# Altium PCB USBC charger.PcbDoc
Units mm, origin at the board's own origin, x right, y up, seen from the top; angles counter-clockwise.
Board outline 33.14 x 10.5 mm, 2 copper layers (Top Layer, Bottom Layer); 23 components, 28 nets, 120 pads, 51 vias.
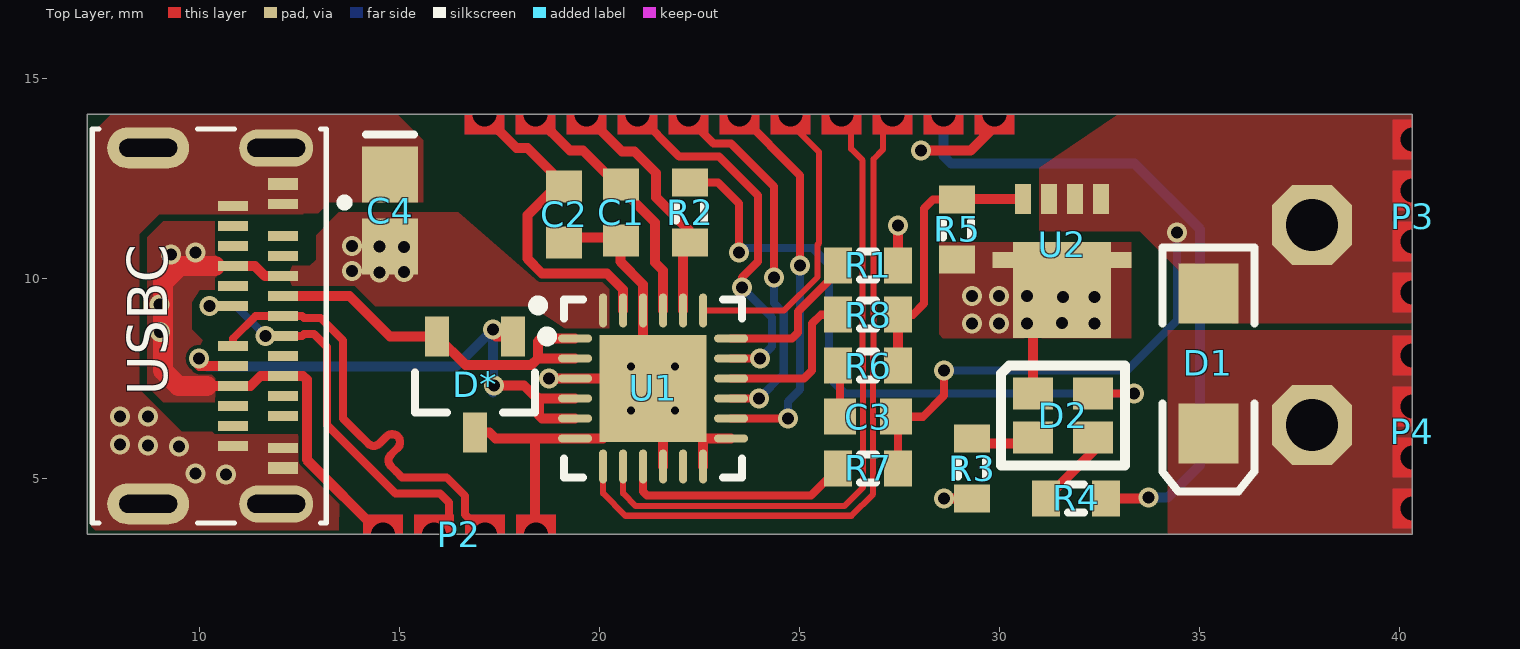
[diagram p0: Top Layer view]
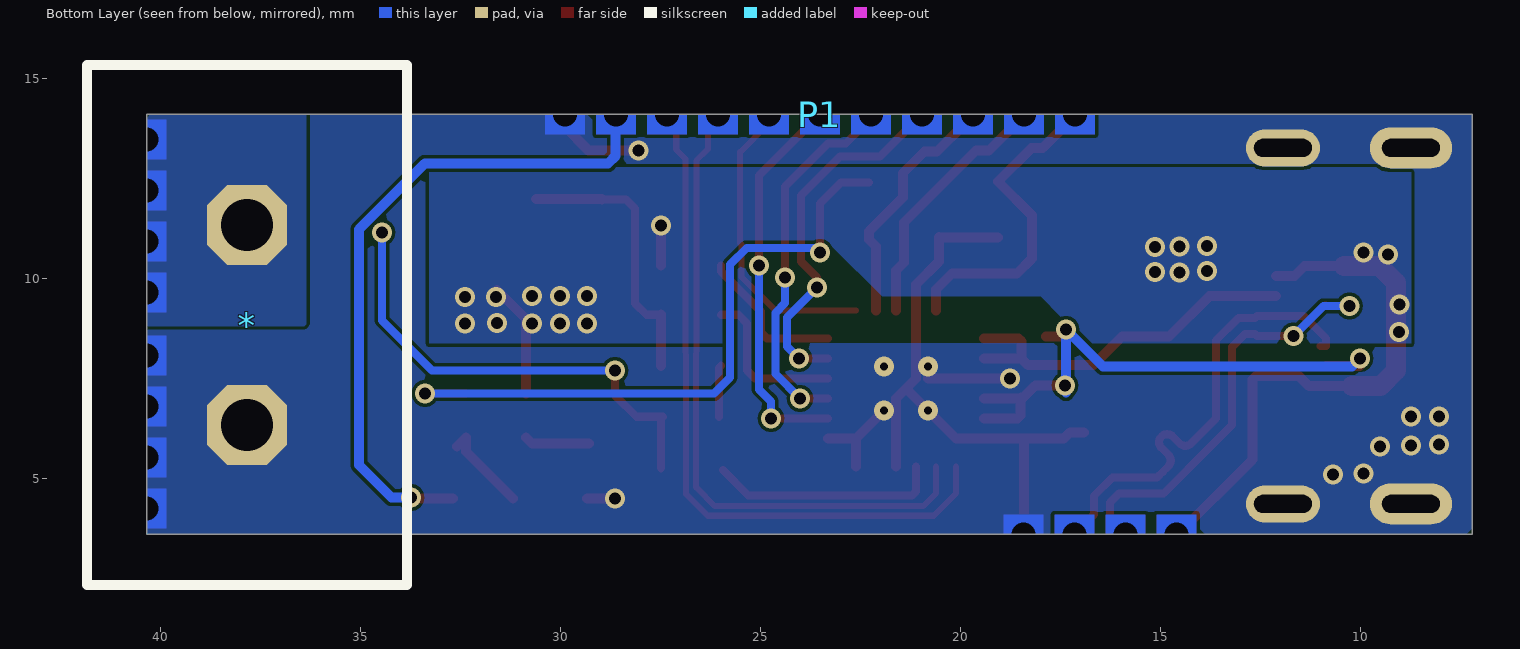
[diagram p1: Bottom Layer view, seen from below]

## Layer stack, top to bottom
Top Solder: solder mask 0.0102, Solder Resist, Dk 3.5
Top Layer: signal copper 0.0356
Dielectric 1: dielectric 0.32, FR-4, Dk 4.8
Bottom Layer: signal copper 0.0356
Bottom Solder: solder mask 0.0102, Solder Resist, Dk 3.5

## Board outline
7.2,14.1 40.335,14.1 40.335,3.6 7.2,3.6

## Design rules (kind name [scope] priority, off if disabled: settings)
Clearance [All] p1: gap=0.089 ignorepadtopadclearanceinfootprint=TRUE
DiffPairsRouting [All] p1: maxlimit=0.254 minlimit=0.089 mostfreqgap=0.2 toplayer_minwidth=0.089 toplayer_maxwidth=0.381 toplayer_prefwidth=0.15 bottomlayer_minwidth=0.089 bottomlayer_maxwidth=0.381 bottomlayer_prefwidth=0.15 maxuncoupledlength=12.7
MatchedLengths usb [All] p1: tolerance=1 checknetsindiffpair=FALSE checkdiffpairvsdiffpair=TRUE checkxsignals=TRUE checkothers=TRUE
PolygonConnect 2pinconn [InNet('GND')] p1: connectstyle=Direct reliefconductorwidth=0.254 reliefentries=4 polygonreliefangle="90 Angle" airgapwidth=0.254
PolygonConnect vbus [InNet('VBUS')] p2: connectstyle=Direct reliefconductorwidth=0.254 reliefentries=4 polygonreliefangle="90 Angle" airgapwidth=0.254
PolygonConnect nothermals [InNet('VOUT')] p3: connectstyle=Direct reliefconductorwidth=0 reliefentries=4 polygonreliefangle="90 Angle" airgapwidth=0
PolygonConnect PolygonConnect_1 [All] p4: connectstyle=Relief reliefconductorwidth=0.254 reliefentries=4 polygonreliefangle="90 Angle" airgapwidth=0.254
RoutingVias [All] p1: holewidth=0.3 width=0.5 viastyle="Through Hole" minholewidth=0.3 minwidth=0.45 maxholewidth=6.3 maxwidth=1.27
SolderMaskExpansion [All] p1: expansion=0.102
Width [All] p1: maxlimit=1 minlimit=0.127 preferedwidth=0.2
29 further rules are at their usual default settings.

## Classes and differential pairs
differential pair USB: +USB_P -USB_N

## Components (designator, comment, footprint, x,y, rotation, side; value= is the part's Value field where it differs from the comment)
* "Component_1" 2pinSrewconnectyor 37.825,11.334 r270 bottom
C1 "Cap Semi" 1608[0603] 20.55,11.65 r90 top value=1uF
C2 "Cap Semi" 1608[0603] 19.125,11.6 r90 top value=1uF
C3 "Cap Semi" 1608[0603] 26.725,6.543 r0 top value=100nF
C4 "Cap Semi" C2512 14.778,11.698 r270 top value=4.7uF
D1 "Diode" 3.2X1.6X1.1 35.23,7.876 r270 top
D2 "SmollCree" SMOLLLEDCREE 32.35,6.025 r180 top
D* "ESDA25" SOT95P245X110-3N 16.9,7.35 r270 top
P1 "Component_1" "edgecon - large" 29.88,14.097 r180 bottom
P2 "edgeconn" edgecon 18.42,3.6 r180 top
P3 "edgeconn" "edgecon - power" 40.335,13.472 r270 top
P4 "edgeconn" "edgecon - power" 40.335,8.075 r270 top
R1 "Res3" J1-0603 26.725,10.325 r0 top value=1K
R2 "Res3" J1-0603 22.275,11.65 r270 top value=22K
R3 "Res3" J1-0603 29.325,5.25 r90 top value=22K
R4 "Res3" J1-0603 31.925,4.5 r180 top value=22K
R5 "Res3" J1-0603 28.95,11.225 r90 top value=100K
R6 "Res3" J1-0603 26.725,7.818 r180 top value=1K
R7 "Res3" J1-0603 26.724,5.254 r180 top value=1K
R8 "Res3" J1-0603 26.725,9.093 r180 top value=22K
U1 "STUSB4500" QFN50P400X400X80_HS-25N 21.35,7.25 r0 top
U2 "STL6P3LLH6" powerflat 32.55,11.989 r180 top
USBC "2305018-2" *TE_2305018-2_2305018-2(PRIMARY) 8.728,8.814 r270 top locked

## Footprints (in the part's own frame and the unit in brackets; to place one, negate y for a bottom-side part, rotate by r counter-clockwise, add the part's x,y. Pads: shape width x height; smd on the part's side, far side on the other; paste and mask are expansions set on the pad)
2pinSrewconnectyor [mm]
  oct 2x2 hole 1.3: 1(0,0) 2(5,0)
  silkscreen extent -4,-4 9,4
3.2X1.6X1.1 [mm] "SMT LED; 2 Flat Leads"
  rect 1.5x1.5 smd: 1(-1.75,0) 2(1.75,0)
  silkscreen extent -2.9,-1.15 3.2,1.15
1608[0603] [mm] "Chip Capacitor, Body 1.6x0.8mm, IPC High Density"
  rect 0.8x0.9 smd: 1(-0.7,0) 2(0.7,0)
  body extent -0.87,-0.48 0.87,0.48, height 1.3
*TE_2305018-2_2305018-2(PRIMARY) [mm]
  rect 0.25x0.75 smd: A1(-3.05,3.375) A2(-2.25,3.375) A3(-1.75,3.375) A4(-1.25,3.375) A5(-0.75,3.375) A6(-0.25,3.375) A7(0.25,3.375) A8(0.75,3.375) A9(1.25,3.375) A10(1.75,3.375) A11(2.25,3.375) A12(3.05,3.375) B1(3,2.125) B2(2.5,2.125) B3(2,2.125) B4(1.5,2.125) B5(1,2.125) B6(0.5,2.125) B7(-0.5,2.125) B8(-1,2.125) B9(-1.5,2.125) B10(-2,2.125) B11(-2.5,2.125) B12(-3,2.125)
  rect 0.3x0.75 smd: G1(-3.55,3.375) G2(3.55,3.375)
  oval 1.025x2.05 hole 0.45 slot 1.45 at 90 deg: S1(-4.45,0) S2(4.45,0)
  oval 0.925x1.85 hole 0.45 slot 1.45 at 90 deg: S3(-4.45,3.2) S4(4.45,3.2)
  silkscreen extent -4.92,-1.4 4.92,5.01, body extent -5.21,-4.2 4.92,4.7, height 3.53
C2512 [mm] "Chip Capacitor, Body 2.54x1.27mm, IPC High Density"
  rect 1.4x1.4 smd: 1(-0.9,0) 2(0.9,0)
  silkscreen extent -1.9,-0.6 -1.9,0.6, body extent -1.45,-0.82 1.45,0.82, height 1.3
edgecon [mil] "Connector; Header; 4 Position"
  round 1 hole 23.62 mask+0: 1(0,0) 2(50.2,0) 3(100.39,0) 4(150.59,0)
  Top Layer region: 130.91,-19.68 170.28,-19.68 170.28,0 130.91,0
  Top Layer region: 80.71,-19.68 120.08,-19.68 120.08,0 80.71,0
  Top Layer region: -19.69,-19.69 19.68,-19.68 19.68,0 -19.69,0
  Top Layer region: 30.51,-19.68 69.88,-19.68 69.88,0 30.51,0
  Bottom Layer region: 130.91,-19.68 170.28,-19.68 170.28,0 130.91,0
  Bottom Layer region: 80.71,-19.68 120.08,-19.68 120.08,0 80.71,0
  Bottom Layer region: -19.69,-19.69 19.68,-19.68 19.68,0 -19.69,0
  Bottom Layer region: 30.51,-19.68 69.88,-19.68 69.88,0 30.51,0
"edgecon - large" [mil] "Connector; Header; 4 Position"
  round 1 hole 23.62 mask+0: 1(0,0) 2(50.2,0) 3(100.39,0) 4(150.59,0) 5(200.79,0) 6(250.98,0) 7(301.18,0) 8(351.38,0) 9(401.57,0) 10(451.77,0) 11(501.97,0)
  Top Layer region: 130.91,0 170.28,0 170.28,-19.68 130.91,-19.68
  Top Layer region: 80.71,0 120.08,0 120.08,-19.68 80.71,-19.68
  Top Layer region: -19.68,0 19.69,0 19.69,-19.68 -19.68,-19.68
  Top Layer region: 30.51,0 69.88,0 69.88,-19.68 30.51,-19.68
  Top Layer region: 231.3,0 270.67,0 270.67,-19.68 231.3,-19.68
  Top Layer region: 181.1,0 220.47,0 220.47,-19.68 181.1,-19.68
  Top Layer region: 281.5,0 320.87,0 320.87,-19.68 281.5,-19.68
  Top Layer region: 331.69,0 371.06,0 371.06,-19.68 331.69,-19.68
  Top Layer region: 432.09,0 471.46,0 471.46,-19.68 432.09,-19.68
  Top Layer region: 381.89,0 421.26,0 421.26,-19.68 381.89,-19.68
  Top Layer region: 482.28,0 521.65,0 521.65,-19.69 482.28,-19.69
  Bottom Layer region: 130.91,0 170.28,0 170.28,-19.68 130.91,-19.68
  Bottom Layer region: 80.71,0 120.08,0 120.08,-19.68 80.71,-19.68
  Bottom Layer region: -19.68,0 19.69,0 19.69,-19.68 -19.68,-19.68
  Bottom Layer region: 30.51,0 69.88,0 69.88,-19.68 30.51,-19.68
  Bottom Layer region: 231.3,0 270.67,0 270.67,-19.68 231.3,-19.68
  Bottom Layer region: 181.1,0 220.47,0 220.47,-19.68 181.1,-19.68
  Bottom Layer region: 281.5,0 320.87,0 320.87,-19.68 281.5,-19.68
  Bottom Layer region: 331.69,0 371.06,0 371.06,-19.68 331.69,-19.68
  Bottom Layer region: 432.09,0 471.46,0 471.46,-19.68 432.09,-19.68
  Bottom Layer region: 381.89,0 421.26,0 421.26,-19.68 381.89,-19.68
  Bottom Layer region: 482.28,0 521.65,0 521.65,-19.69 482.28,-19.69
"edgecon - power" [mil] "Connector; Header; 4 Position"
  round 1 hole 23.62 mask+0: 1(0,0) 2(50.2,0) 3(100.39,0) 4(150.59,0)
  Top Layer region: 30.51,-19.68 69.88,-19.68 69.88,0 30.51,0
  Top Layer region: -19.69,-19.69 19.68,-19.69 19.68,0 -19.69,0
  Top Layer region: 80.71,-19.68 120.08,-19.68 120.08,0 80.71,0
  Top Layer region: 130.91,-19.68 170.28,-19.68 170.28,0 130.91,0
  Bottom Layer region: 30.51,-19.68 69.88,-19.68 69.88,0 30.51,0
  Bottom Layer region: -19.69,-19.69 19.68,-19.69 19.68,0 -19.69,0
  Bottom Layer region: 80.71,-19.68 120.08,-19.68 120.08,0 80.71,0
  Bottom Layer region: 130.91,-19.68 170.28,-19.68 170.28,0 130.91,0
J1-0603 [mm] "Chip Resistor, Body 1.6x0.8mm, IPC High Density"
  rect 0.7x0.9 smd: 1(-0.75,0) 2(0.75,0)
  silkscreen extent -0.2,-0.35 0.2,0.35, body extent -0.85,-0.48 0.85,0.48, height 0.9
powerflat [mm]
  rect 0.4x0.75 smd: 1(0,0) 1(0.65,0) 1(1.3,0) 2(1.95,0)
  rect 0.53x0.4 smd: 3(-0.5,1.525) 3(2.45,1.525)
  rect 2.45x2.4 smd: 3(0.975,2.275)
QFN50P400X400X80_HS-25N [mm] "QFN, 24-Leads, Body 4,00x4,00mm, Pitch 0,50mm, Thermal Pad 2,68x2,68mm, IPC Medium Density"
  oval 0.85x0.2 smd: 1(-1.95,1.25) 2(-1.95,0.75) 3(-1.95,0.25) 4(-1.95,-0.25) 5(-1.95,-0.75) 6(-1.95,-1.25) 13(1.95,-1.25) 14(1.95,-0.75) 15(1.95,-0.25) 16(1.95,0.25) 17(1.95,0.75) 18(1.95,1.25)
  oval 0.2x0.85 smd: 7(-1.25,-1.95) 8(-0.75,-1.95) 9(-0.25,-1.95) 10(0.25,-1.95) 11(0.75,-1.95) 12(1.25,-1.95) 19(1.25,1.95) 20(0.75,1.95) 21(0.25,1.95) 22(-0.25,1.95) 23(-0.75,1.95) 24(-1.25,1.95)
  rect 2.68x2.68 smd: 25(0,0)
  silkscreen extent -3,-2.22 2.22,2.23, body extent -2.08,-2.08 2.08,2.08, height 0.8
SMOLLLEDCREE [mm] "CLMVC-FKA"
  rect 1x0.8 smd: 1(1.5,-1.1) 2(0,-1.1) 3(0,0) 4(1.5,0)
  silkscreen extent -0.8,-1.8 2.3,0.7, body extent -0.25,-1.55 1.75,0.45, height 1
SOT95P245X110-3N [mm] "SOT23, 3-Leads, Body 2,90x2,45mm, Pitch 0,95mm, IPC Medium Density"
  rect 1x0.6 smd: 1(-1.2,0.95) 2(-1.2,-0.95) 3(1.2,0)
  silkscreen extent -1.32,-1.5 0.7,1.93, body extent -0.7,-1.5 0.7,1.5, height 1.1

## Part data
C1 C2 C3 C4: "Capacitor (Semiconductor SIM Model)", LatestRevisionDate=29-May-2009, LatestRevisionNote="IPC-7351 Footprint Added.", PackageDescription="Chip Capacitor", PackageReference=C1206, Published=8-Jun-2000, Publisher="Altium Limited"
D1: "Default Diode", Code_JEDEC=DO-214-AB, LatestRevisionDate=17-Jul-2002, LatestRevisionNote="Re-released for DXP Platform.", PackageDescription="DO-214-AB/SMC; 2 C-Bend Leads; Body 7.9 x 5.9 mm, inc. leads (LxW)", PackageReference=SMC, PackageVersion=Sep-1996, Published=8-Jun-2000, Publisher="Altium Limited"
D*: library part Component_1, "Generic Sot23 package"
P2 P3 P4: "Header, 4-Pin", LatestRevisionDate=17-Jul-2002, LatestRevisionNote="Re-released for DXP Platform.", Publisher="Altium Limited"
R1 R2 R3 R4 R5 R6 R7 R8: "Resistor", LatestRevisionDate=29-May-2009, LatestRevisionNote="IPC-7351 Footprint Added.", PackageDescription="Chip Resistor", PackageReference=J1-0603, Published=8-Jun-2000, Publisher="Altium Limited"
U1: "stusb4500 PD ic"
USBC: "TYPE C Right Angle Sealable SMT IPX8 3.1 GEN 2 Wire to Board USB", Package=None, Availability=Unavailable, MF="TE Connectivity", MP=2305018-2, Price=None, SnapEDA_Link=https://www.snapeda.com/parts/2305018-2/TE%20Connectivity%20AMP%20Connectors/view-part/?ref=snap, TE_purchase_URL=https://www.te.com/usa-en/product-2305018-2.html?te_bu=Cor&te_type=disp&te_campaign=seda_glo_cor-seda-global-disp-prtnr-fy19-seda-model-bom-cta_sma-317_1&elqCampaignId=32493

## Via types
v1: diameter 0.5, hole 0.3, Top Layer to Bottom Layer, 47 vias
v2: diameter 0.5, hole 0.2, Top Layer to Bottom Layer, 4 vias

## Nets (pads, with @x,y where several pads share a name; then routed paths per layer and width w, separated by ;. In a path a pad name is that pad's centre, name@x,y a point inside that pad or via, vN(x,y) a via of type N, cw(c..) or ccw(c..) an arc to the next point about the centre after c; other vN are vias at no path point)
1V2: C1.2 P1.10 U1.21 | length 6.4
  Top Layer w0.25: P1.10 18.405,14.069 19.275,13.2 19.6,13.2 21.4,11.4 21.4,10.401 21.6,10.201 U1.21
2V7: C2.2 P1.11 U1.23 | length 8.1
  Top Layer w0.25: P1.11 17.13,14.07 17.936,13.264 18.211,13.264 19.05,12.425 18.207,11.582 18.207,10.493 18.575,10.125 20.2,10.125 20.6,9.725 U1.23
A_B_SIDE: P1.8 U1.17 | length 9.3
  Top Layer w0.203: P1.8 22.002,13.05 23,13.05 23.975,12.075 23.975,10.425 23.575,10.025 v1(23.575,9.77) ; U1.17 v1(24.025,8)
  Bottom Layer w0.203: v1(23.575,9.77) 24.325,9.02 24.325,8.3 v1(24.025,8)
ALERT: P1.5 U1.19 | length 7.6
  Top Layer w0.152: U1.19 24.625,9.2 25.46,10.035 25.46,10.843 25.5,10.883 25.5,13.157 24.78,13.877 P1.5
ATTACH: U1.11
CC1: D*.2 U1.1 U1.2 USBC.A5 | length 9.5
  Top Layer w0.25: USBC.A5 13.761,9.564 14.775,8.55 D*.2 16.664,7.836 18.306,7.836 18.47,8 ; U1.2 18.47,8 ; U1.1 18.54,8.5 18.47,8.43 18.47,8
CC2: D*.1 U1.4 U1.5 USBC.B5 | length 14.8
  Top Layer w0.25: v1(10,8) 10,7.828 10.014,7.814 USBC.B5 ; v1@17.25,8.725 17.425,8.55 D*.1 ; v1(17.375,7.325) 18.12,7.325 18.445,7 18.47,7.025 18.495,7 ; U1.5 18.57,6.5 18.495,6.575 18.495,7 ; U1.4 18.495,7
  Bottom Layer w0.25: v1(10,8) 10.2,7.8 16.425,7.8 v1(17.35,8.725) 17.35,7.15 17.375,7.175 v1(17.375,7.325)
GND: *.2 C1.1 C2.1 C4.1 D1.2 D*.3 P1.1 P2.1 P4.1 P4.2 P4.3 P4.4 R3.1 U1.3 U1.6 U1.10 U1.12 U1.13 U1.22 U1.25 USBC.A1 USBC.A12 USBC.B1 USBC.B12 USBC.G1 USBC.G2 USBC.S1 USBC.S2 USBC.S3 USBC.S4 | length 22.8
  Top Layer w0.25: D*.3 17.257,6.15 17.407,6 18.4,6 ; P2.1 18.4,3.62 18.4,6 ; v1(18.75,7.5) U1.3 U1.25@20.8,7.5 ; C2.1@19.05,11.025 20.515,11.025 20.532,11.042 20.532,10.418 21.1,9.85 U1.22 21.1,7.5 U1.25 ; U1.10 21.6,7 U1.25 ; v2(21.9,6.7) U1.25@22.6,6 ; U1.12 U1.25@22.6,6 ; U1.13 U1.25@22.6,6 ; v1(28.043,13.195) 29.284,13.195 29.88,13.791 P1.1 ; v1(28.625,4.5) R3.1 ; 18.4,6 U1.6 20.1,6 U1.25
  Bottom Layer w0.25: *.2@37.825,6.725 *.2@37.825,6.925
  other v1: 10.675,5.1 9.915,5.122 9.5,5.8 8.728,5.825 8.025,5.85 8.025,6.553 8.725,6.55
  other v2: 20.8,6.7 20.8,7.8 21.9,7.8
GPIO: P1.7 U1.15 | length 9.3
  Top Layer w0.203: P1.7 22.23,14.002 22.858,13.375 23.3,13.375 24.375,12.3 v1(24.375,10.025) ; U1.15 v1(24,7)
  Bottom Layer w0.203: v1(24,7) 24.617,7.617 24.617,9.141 24.375,9.383 v1(24.375,10.025)
LED: P1.2 R4.1 | length 16.8
  Top Layer w0.25: R4.1 v1@33.782,4.5
  Bottom Layer w0.25: P1.2 28.61,14.093 28.61,13.065 28.8,12.875 33.381,12.875 35.027,11.229 35.027,5.334 34.214,4.521 v1(33.731,4.521)
NetC3_1: C3.1 R6.2 | length 1.3
  Top Layer w0.203: R6.2 26.025,7.768 C3.1
NetD2_2: D2.2 R2.1 | length 16.8
  Top Layer w0.203: R2.1 22.975,12.4 23.5,11.875 v1(23.5,10.65) ; D2.2 v1(33.375,7.125)
  Bottom Layer w0.203: v1(23.5,10.65) 23.616,10.766 25.334,10.766 25.75,10.35 25.75,7.525 26.15,7.125 v1(33.375,7.125)
NetD2_3: D2.3 R4.2 | length 2.3
  Top Layer w0.25: R4.2 32.35,5.675 D2.3 D2.3@32.575,5.8
NetD2_4: D2.4 R3.2 | length 1.6
  Top Layer w0.25: R3.2@29.275,5.875 30.7,5.875 D2.4
NetR1_1: R1.1 U1.18 | length 3.8
  Top Layer w0.2: U1.18 24.825,8.5 24.975,8.65 24.975,9.175 25.975,10.175 R1.1
NetR5_2: R5.2 R6.1 R8.1 U2.2 | length 7
  Top Layer w0.203: R8.1 27.843,9.093 28.125,9.375 28.125,11.75 28.35,11.975 R5.2
  Top Layer w0.254: R6.1 R8.1 ; R5.2 28.964,11.989 U2.2
NetR7_2: R7.2 U1.9 | length 5.8
  Top Layer w0.203: U1.9 21.1,4.675 21.2,4.575 25.295,4.575 R7.2@25.929,5.209
NetR8_2: R8.2 U1.16 | length 4
  Top Layer w0.203: U1.16 25.125,7.5 25.325,7.7 25.325,8.875 25.543,9.093 R8.2
POWER_PDO2: P1.9 R2.2 U1.20 | length 6.2
  Top Layer w0.25: P1.9 19.923,13.855 19.923,13.827 20.575,13.175 20.886,13.175 21.425,12.636 21.425,12.028 22.275,11.178 22.275,10.975 22.1,10.8 U1.20
POWER_PDO3: P1.6 U1.14 | length 9.8
  Top Layer w0.203: U1.14 v1(24.725,6.5) ; P1.6 25.026,12.576 v1(25.026,10.326)
  Bottom Layer w0.203: v1(24.725,6.5) 24.725,6.925 25.026,7.226 v1(25.026,10.326)
SBU1: USBC.A8
SBU2: USBC.B8
SCL: P1.3 U1.7 | length 17.6
  Top Layer w0.152: U1.7 20.1,4.625 20.658,4.067 26.307,4.067 26.85,4.61 26.85,4.8 26.86,11.435 26.86,12.985 27.097,13.222 27.097,13.864 P1.3
SDA: P1.4 U1.8 | length 16.5
  Top Layer w0.152: U1.8 20.6,4.625 20.916,4.309 26.134,4.309 26.6,4.775 26.59,11.519 26.59,12.95 26.3,13.24 26.3,13.852 P1.4
USB_N: P2.3 USBC.A7 USBC.B7 | length 10.8
  Top Layer w0.2: v1(10.261,9.314) USBC.B7 USBC.B7@10.864,9.325 ; v1(11.664,8.564) USBC.A7 12.578,8.564 12.628,8.614 12.875,8.614 13.2,8.289 13.2,6.334 13.701,5.834 14.909,4.625 16.025,4.625 16.25,4.4 16.25,3.97 P2.3@15.88,3.6
  Bottom Layer w0.2: v1(10.261,9.314) 10.914,9.314 v1(11.664,8.564)
USB_P: P2.2 USBC.A6 USBC.B6 | length 11.5
  Top Layer w0.2: USBC.B6@10.985,8.314 USBC.B6 10.853,8.503 11.414,9.064 USBC.A6 12.578,9.064 12.628,9.014 13.041,9.014 13.6,8.455 13.6,6.5 13.938,6.163 14.226,5.874 ccw(c14.368,6.015) 14.509,5.874 14.685,6.049 cw(c14.826,5.907) 14.967,6.049 cw(c14.826,5.907) 14.967,5.766 14.792,5.591 ccw(c14.934,5.449) 14.792,5.308 14.934,5.166 15.075,5.025 16.191,5.025 16.65,4.566 16.65,4.1 P2.2@17.15,3.6
VBUS: C4.2 D2.1 P2.4 R1.2 R5.1 U1.24 U2.3 USBC.A4 USBC.A9 USBC.B4 USBC.B9 | length 18
  Top Layer w0.25: 10.2,7.314 USBC.B4 11.283,7.314 11.533,7.564 USBC.A9 12.6,7.564 12.692,7.472 12.692,5.47 14.562,3.6 14.61,3.6 ; 10.4,10.314 USBC.B9 11.393,10.314 11.643,10.064 USBC.A4 ; R1.2 v1(27.475,11.325) ; D2.1 30.85,8.989 U2.3@31.575,9.714
  Top Layer w0.5: 10.2,7.314 9.486,7.314 9.1,7.7 9.1,9.894 9.52,10.314 10.4,10.314
  other v1: 9.024,8.661 29.325,8.875 30,8.875 30.7,8.875 32.382,8.875 31.575,8.888 9.01,9.35 29.325,9.557 30.7,9.557 31.6,9.539 32.382,9.539 30,9.564 14.509,10.147 15.124,10.161 13.824,10.187 9.3,10.6 9.91,10.65 14.509,10.798 15.124,10.786 13.824,10.812
VOUT: *.1 C3.2 D1.1 P3.1 P3.2 P3.3 P3.4 R7.1 U2.1 | length 11.9
  Top Layer w0.203: R7.1 27.474,6.494 C3.2 28.093,6.543 28.625,7.075 v1(28.625,7.7)
  Bottom Layer w0.203: v1(28.625,7.7) 33.2,7.7 34.45,8.95 v1(34.45,11.15)
pads on no net: USBC.A2 USBC.A3 USBC.A10 USBC.A11 USBC.B2 USBC.B3 USBC.B10 USBC.B11

## Polygon pours and split planes (outlines as drawn)
GND on Top Layer "Top Layer-GND" (solid, pour order 30): 13.497,3.7 13.5,4.8 12.5,5.791 12.5,6.1 10.388,6.1 10.325,6.163 9.562,6.163 8.5,7.225 8.5,11.1 9,11.6 12.6,11.6 12.6,11.628 12.975,11.628 13.247,11.9 15.6,11.9 15.6,13.45 14.95,14.1 7.8,14.1 7.3,13.6 7.3,3.8 7.4,3.7
VOUT on Top Layer "Top Layer-VOUT" (solid, pour order 10): 31,11.178 31,12.767 32.98,14.1 40.335,14.1 40.335,8.875 35.825,8.875 33.522,11.178
GND on Top Layer "Top Layer-GND 1" (solid, pour order 6): 34.214,8.7 40.335,8.7 40.335,3.62 34.214,3.62
VBUS on Top Layer "Top Layer-VBUS 1" (solid, pour order 24): 10.448,11.4 10.413,11.435 9.1,11.435 9.1,11.428 8.7,11.028 8.7,7.3 9.1,6.9 10.4,6.9
no net on Top Layer "Top Layer-No Net" (solid, pour order 22): 8.9,5.675
no net on Top Layer "Top Layer-No Net 1" (solid, pour order 20): 8.9,5.675
no net on Top Layer "Top Layer-No Net 2" (solid, pour order 18): 8.9,5.675
VBUS on Top Layer "Top Layer-VBUS 2" (solid, pour order 16): 33.3,8.503 28.597,8.503 28.5,8.6 28.5,10.9 33.3,10.9
VBUS on Top Layer "Top Layer-VBUS" (solid, pour order 14): 20.25,8.75 20.25,9.725 20.075,9.9 18.42,9.975 16.475,11.65 13.497,11.65 12.925,11.078 12.925,10.474 12.763,10.314 11.675,10.314 11.675,9.875 11.736,9.814 13.886,9.814 14.4,9.3 18.3,9.3 19.139,8.75
GND on Bottom Layer "Bottom Layer-GND" (solid, pour order 32): 40.335,3.6 7.35,3.6 7.2,3.75 7.2,14.1 40.335,14.1
VBUS on Bottom Layer "Bottom Layer-VBUS" (solid, pour order 28): 33.275,8.375 33.275,12.775 8.725,12.775 8.725,8.375 17.665,8.375 17.482,9.044 17.988,9.55 21.949,9.55 23.181,10.782 24.125,9.838 24.125,8.375
VOUT on Bottom Layer "Bottom Layer-VOUT" (solid, pour order 8): 40.335,8.808 36.4,8.808 36.347,8.808 36.347,14.1 40.335,14.1
no net on Bottom Solder (solid): 10.4,8.4

## Other copper
Top Layer:
  pour cut-out: 17.825,3.625 17.8,3.65 17.8,4.991 16.541,6.25 15.25,6.25 14.125,7.375 14.125,8.725 13.136,9.714 10.017,9.714 9.816,9.401 9.816,8.728 10.384,8.159 12.132,7.593 12.512,5.887 14,4.4 14.775,4.3 15.225,3.85 15.225,3.625
Bottom Layer:
  pour cut-out: 17.482,9.044 17.665,8.375 24.125,8.375 24.125,9.838 23.181,10.782 21.949,9.55 17.988,9.55

## Silkscreen, mask and mechanical layers (free items; w line width, h text height)
Mechanical 1:
  lines w0.254: 7.207,3.6 40.315,3.6 ; 7.214,3.607 7.214,14.1 40.335,14.1 40.335,3.62